# Altium PCB 2014 12 12 DRIVER.PcbDoc
Units mil, origin at the board's own origin, x right, y up, seen from the top; angles counter-clockwise.
Board outline 3000 x 2605 mil, 2 copper layers (Top Layer, Bottom Layer); 70 components, 51 nets, 223 pads, 48 vias.
Unrouted connection lines stored in the file: 1.
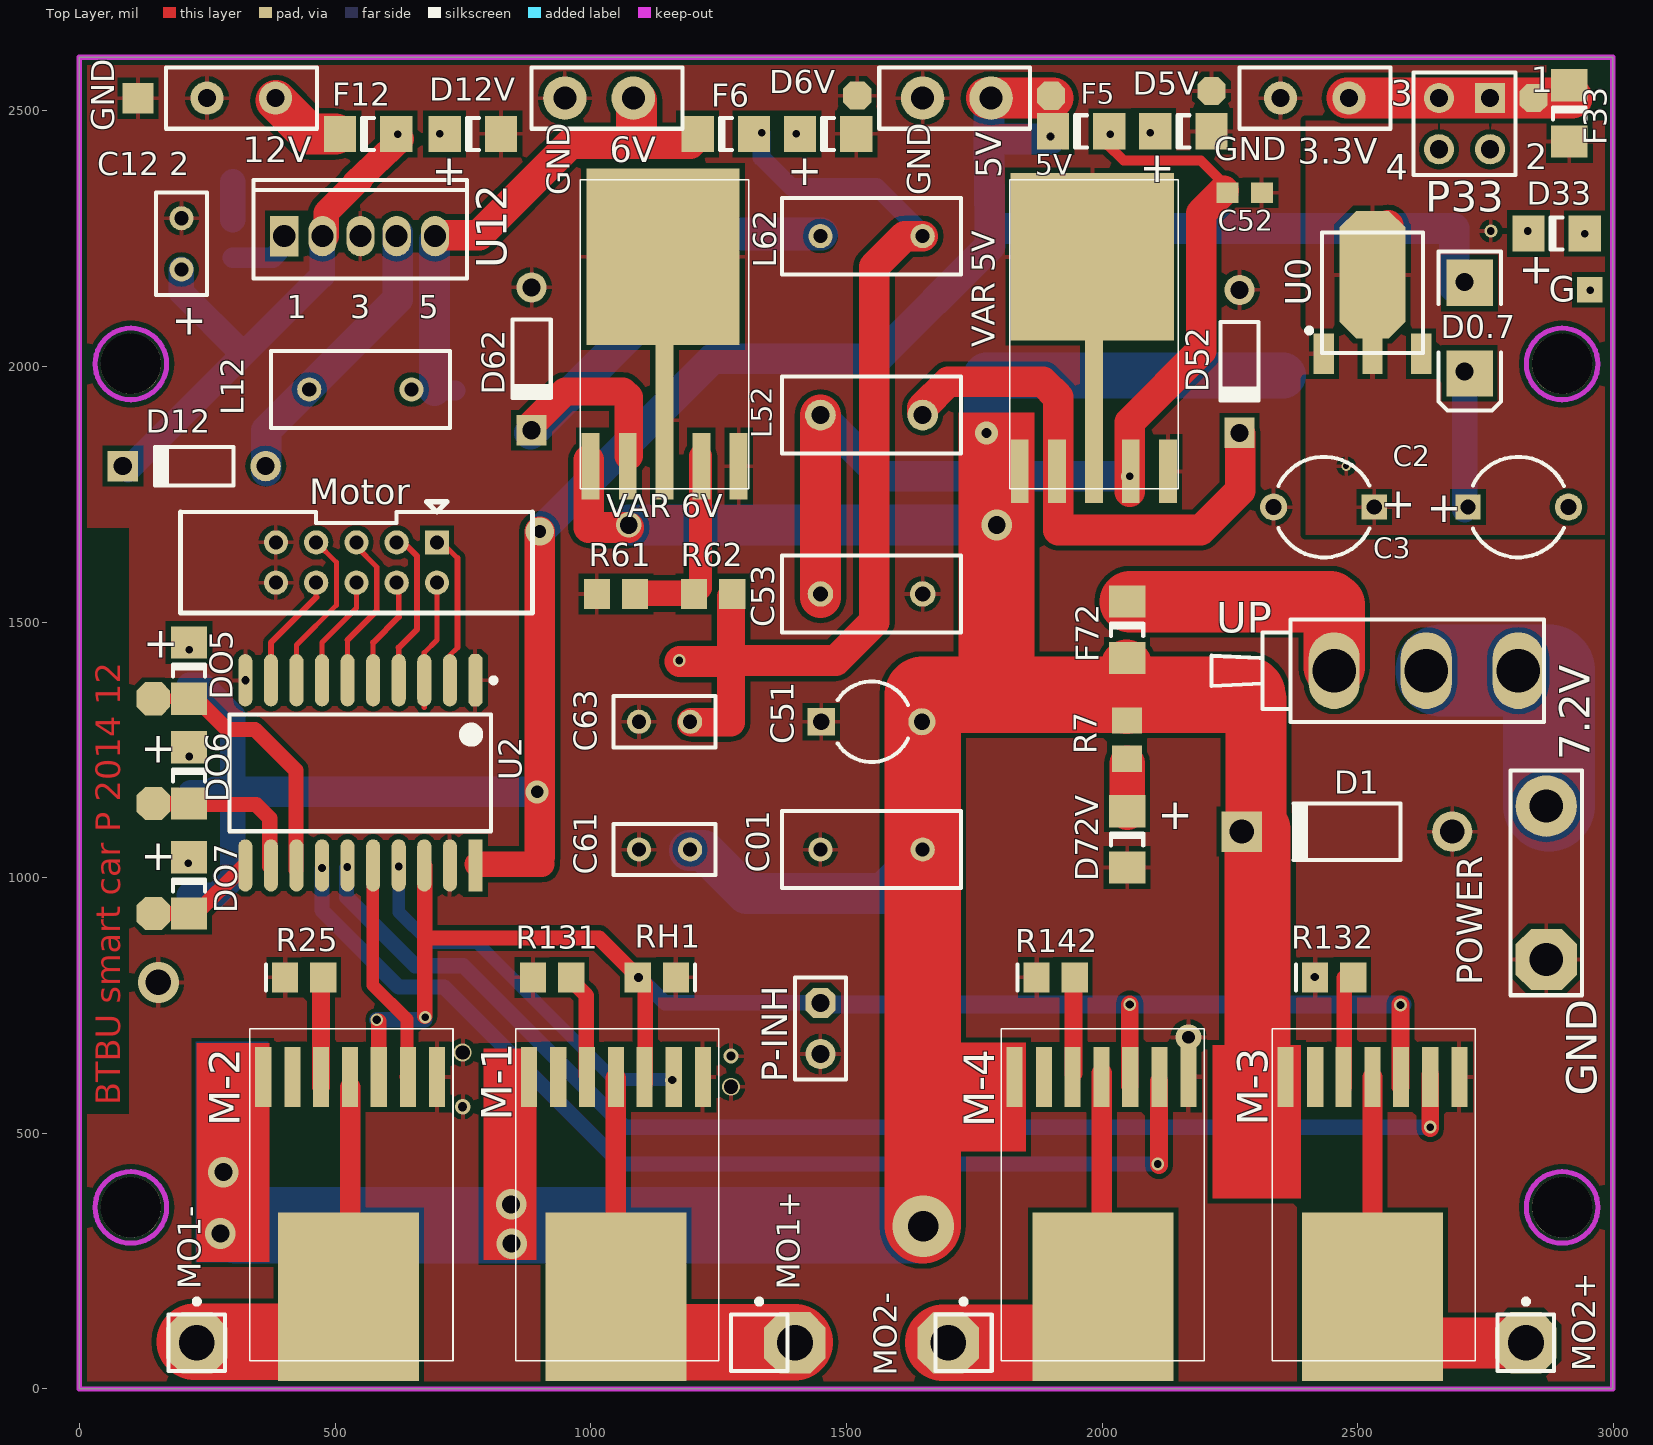
[diagram p0: Top Layer view]
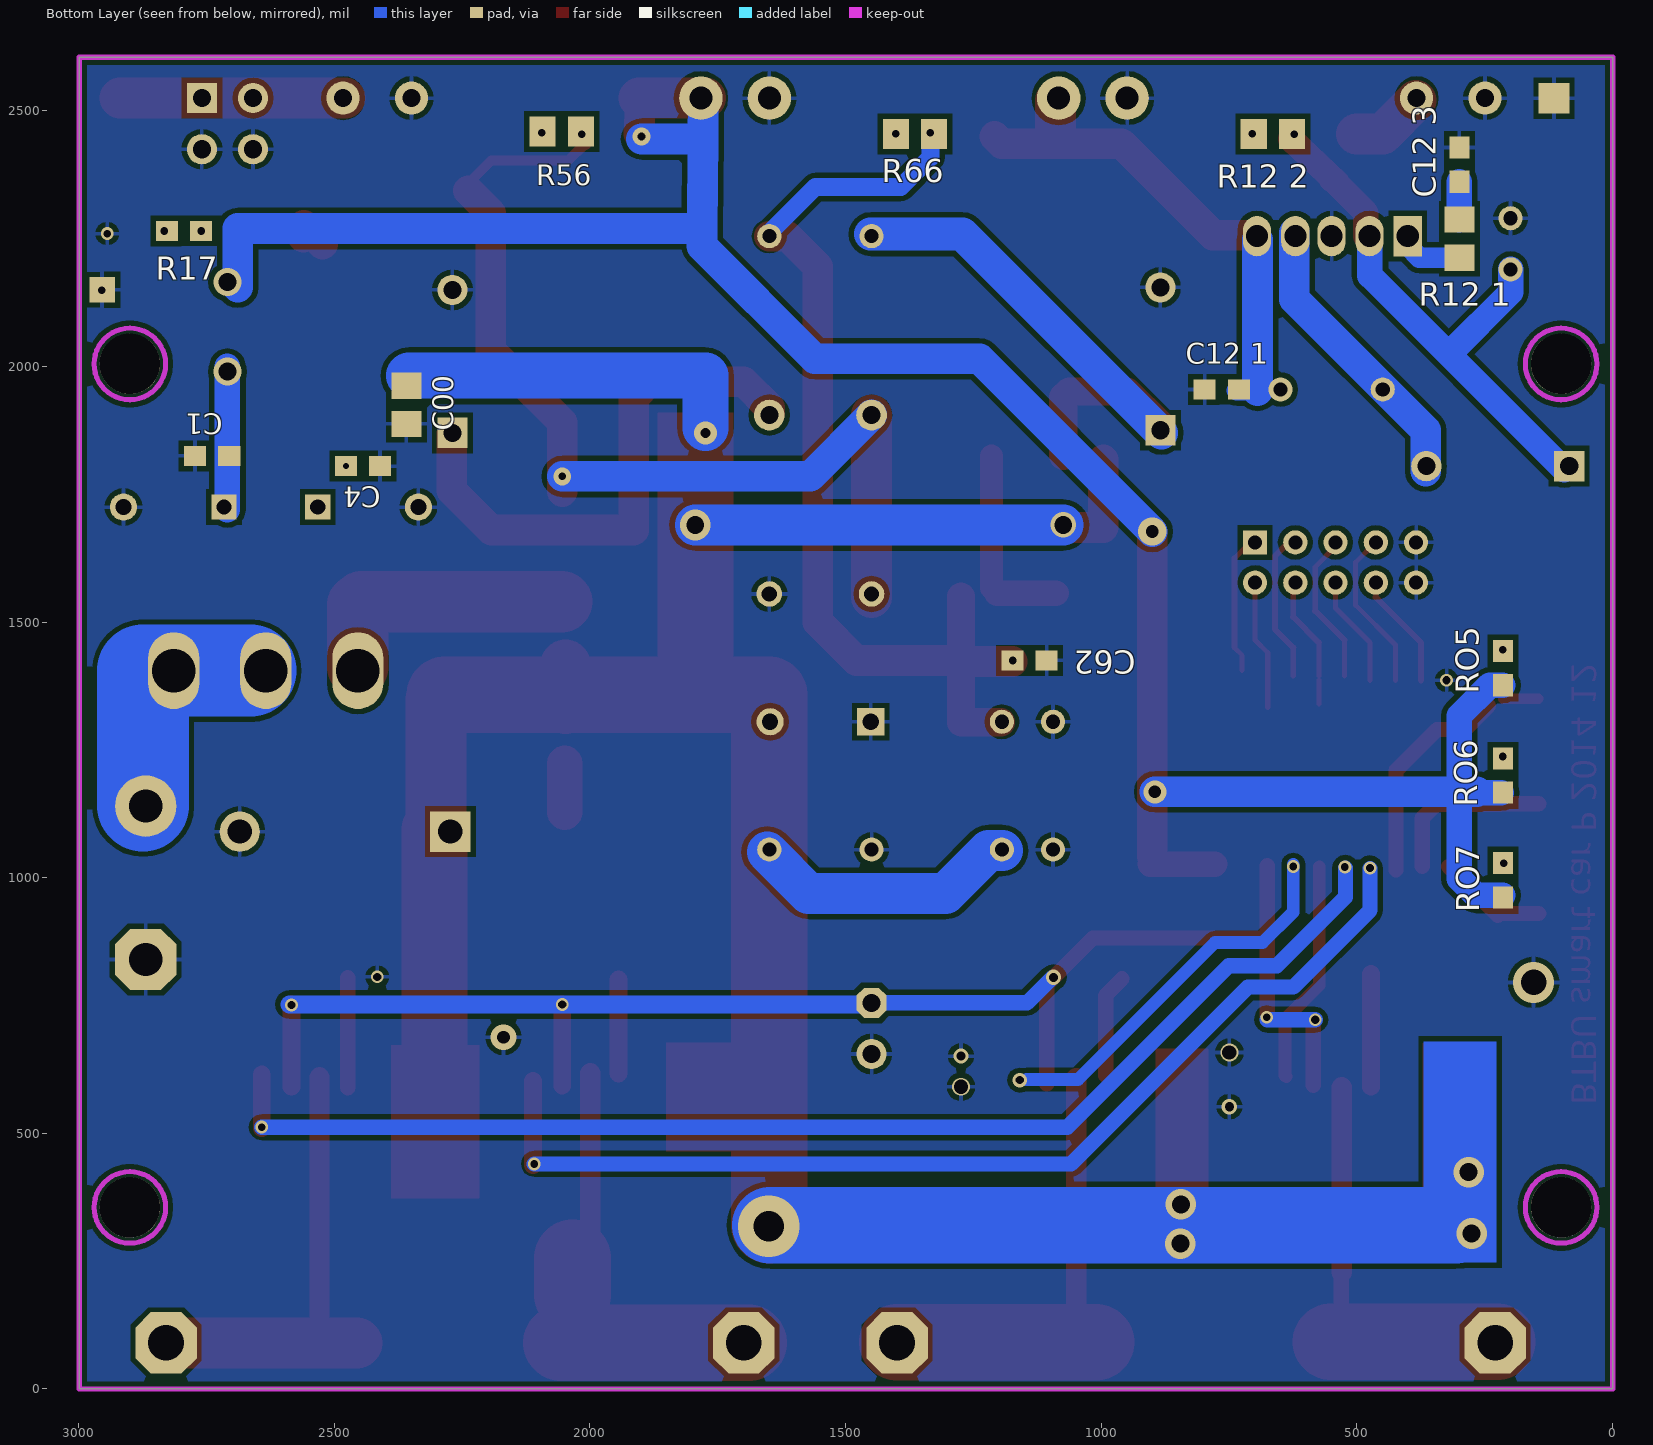
[diagram p1: Bottom Layer view, seen from below]

## Layer stack, top to bottom
Top Layer: signal copper 1.4
Dielectric: dielectric 12.6, FR-4, Dk 4.8
Bottom Layer: signal copper 1.4

## Board outline
-1,2605 2999,2605 2999,0 -1,0

## Design rules (kind name [scope] priority, off if disabled: settings)
Clearance [All] p1: gap=6
ComponentClearance [All] p1: gap=10 collisioncheckmode=3 verticalgap=10
DiffPairsRouting [All] p1: maxlimit=10 minlimit=8 mostfreqgap=10 maxuncoupledlength=500
PlaneClearance [All] p1: clearance=10
PolygonConnect [All] p1: connectstyle=Relief reliefconductorwidth=8 reliefentries=4 polygonreliefangle="90 Angle"
RoomDefinition "2013 11 11 DRIVER" [InComponentClass('2013 11 11 DRIVER')] p1: confinementstyle=ConfineIn formatcopy=TRUE lockcomponents=FALSE outline 3518.6,53.9 4321,53.9 4321,771.9 3518.6,771.9
RoutingVias [All] p1: holewidth=15 width=20 viastyle="Through Hole" minholewidth=12 minwidth=18 maxholewidth=80 maxwidth=120
SolderMaskExpansion [All] p1: expansion=6
TestPointUsage [All] p1: valid=0 allowmultiple=FALSE
Testpoint [All] p1: side=7 testpointundercomponent=TRUE minsize=40 maxsize=100 preferedsize=60 minholesize=0 maxholesize=40 preferedholesize=32 testpointgrid=1 style=1021 order=0-112345678
Width [All] p1: maxlimit=200 minlimit=10 preferedwidth=10 toplayer_prefwidth=12 bottomlayer_prefwidth=12 minimp=50.000000 maximp=50.000000 favimp=50.000000
16 further rules are at their usual default settings.

## Components (designator, comment, footprint, x,y, rotation, side; value= is the part's Value field where it differs from the comment)
C00 "104  16V" 2012[0805] 2359,1925 r90 bottom
C01 "Cap Pol3" RAD-0.2#1 1549,1055 r180 top
C1 "C1" 1608[0603] 2739,1825 r180 bottom
C2 "47uf" CAPPR5-5x5 2814,1725 r0 top
C3 "47uf" CAPPR5-5x5 2434,1725 r180 top
C4 "C1" 1608[0603] 2444,1805 r0 bottom
"C12 1" "104" 1608[0603] 764,1955 r180 bottom
"C12 2" "Cap Pol3" RAD-0.1 199,2240 r90 top
"C12 3" ".33" 1608[0603] 299,2395 r270 bottom
C51 "300uF" CAPR5-4X5 1549,1305 r0 top
C52 "104" 1608[0603] 2279,2340 r180 top
C53 "Cap Pol3" RAD-0.2#2 1549,1555 r0 top
C61 "100uF" RAD-0.1 1144,1055 r0 top
C62 "104" 1608[0603] 1140,1425 r0 bottom
C63 "Cap Pol3" RAD-0.1 1144,1305 r180 top
D0.7 "D Schottky" SMB 2719,2075 r270 top
D1 "1N4007" DO-41 2479,1090 r180 top
D5V "LED3" C1206 2159,2460 r0 top
D6V "LED3" C1206 1464,2455 r0 top
D12 "1N5822" DO-35 224,1805 r180 top
D12V "LED3" C1206 769,2455 r0 top
D33 "LED3" C1206 2889,2260 r0 top (schematic designator GREEN)
D52 "11DQ06" DO-35 2269,2010 r270 top (schematic designator D62)
D62 "1N5822" DO-35 884,2015 r270 top
D72V "LED3" C1206 2049,1075 r270 top
DO5 "LED3" C1206 214,1405 r270 top (schematic designator D12V)
DO6 "LED3" C1206 214,1200 r270 top (schematic designator D12V)
DO7 "LED3" C1206 214,985 r270 top (schematic designator D12V)
F5 "Fuse 1" C1206 1959,2460 r0 top
F6 "Fuse 1" C1206 1264,2455 r0 top
F12 "Fuse 1" C1206 564,2455 r0 top
F33 "Fuse 1" C1206 2914,2495 r270 top
F72 "Fuse 1" C1206 2049,1485 r270 top
L12 "Inductor Iron" RAD-0.2#1 549,1955 r180 top
L52 "Inductor Iron" RAD-0.2#3 1549,1905 r180 top
L62 "Inductor Iron" RAD-0.2#1 1549,2255 r0 top
M-1 "BTN7970B" TO263-7#1 1199,610 r180 top locked
M-2 "BTN7970B" TO263-7#2 679,610 r180 top locked
M-3 "BTN7970B" TO263-7#3 2679,610 r180 top locked
M-4 "BTN7970B" TO263-7#4 2149,610 r180 top locked
MO1+ "" PIN1#1 1329,90 r0 top
MO1- "" PIN1#2 229,90 r0 top
MO2+ "" PIN1#2 2829,90 r0 top
MO2- "" PIN1#3 1729,90 r0 top
Motor "MHDR2X5" IDC10S 699,1655 r0 top
P33 "S1" HDR2X2 2759,2525 r180 top
P-INH "Header 2" HDR1X2#1 1449,755 r270 top
POWER "Header 2" HDR1X2#2 2869,940 r90 top
R7 "Res Semi" 2012[0805] 2049,1270 r90 top
"R12 1" "Res Semi" 2012[0805] 299,2250 r270 bottom
"R12 2" "Res Semi" 2012[0805] 664,2455 r180 bottom
R17 "Res3" J1-0603 2794,2265 r180 bottom
R25 "Res Semi" 0805 439,805 r0 top (schematic designator R14)
R56 "Res Semi" 2012[0805] 2055,2460 r180 bottom
R61 "Res Semi" 2012[0805] 1049,1555 r0 top
R62 "Res Semi" 2012[0805] 1239,1555 r0 top
R66 "Res Semi" 2012[0805] 1364,2455 r180 bottom
R131 "Res Semi" 2012[0805] 924,805 r0 top
R132 "Res Semi" 0805 2454,805 r0 top
R142 "Res Semi" 0805 1909,805 r0 top
RH1 "Res Semi" 0805 1129,805 r180 top
RO5 "Res3" J1-0603 214,1410 r270 bottom
RO6 "Res3" J1-0603 214,1200 r270 bottom
RO7 "Res3" J1-0603 214,995 r270 bottom
U0 "LM1117 IMPX 3.3" SOT89 2529,2125 r0 top
U2 "M74HC541M1R" SO20_M 549,1205 r270 top
U12 "LM2577T-12" T05A 549,2255 r0 top locked
UP "DIP4_1" TL36WW15050 2614,1405 r180 top
"VAR 5V" "LM2576-5.0" TO263-5#1 2019,1805 r0 top
"VAR 6V" "LM2576-5.0" TO263-5#2 1179,1805 r0 top

## Footprints (in the part's own frame and the unit in brackets; to place one, negate y for a bottom-side part, rotate by r counter-clockwise, add the part's x,y. Pads: shape width x height; smd on the part's side, far side on the other; paste and mask are expansions set on the pad)
0805 [mm] "Chip Capacitor; Body 2.0 x 1.2 mm (LxW typ)"
  rect 1.3x1.5 smd: 1(-0.95,0) 2(0.95,0)
  silkscreen extent -1.9,-0.65 -1.9,0.65
1608[0603] [mm] "Chip Capacitor; Body 1.6 x 0.8 mm (LxW typ)"
  rect 1.1x1 smd: 1(-0.85,0) 2(0.85,0)
2012[0805] [mm] "Chip Resistor; Body 2.0 x 1.3 mm (LxW typ)"
  rect 1.3x1.5 smd: 1(-0.95,0) 2(0.95,0)
C1206 [mm] "Chip Capacitor; Body 3.2 x 1.6 mm (LxW typ)"
  rect 1.6x1.8 smd: 1(-1.4,0) 2(1.4,0)
  silkscreen extent -0.3,-0.8 0.3,0.8
CAPPR5-5x5 [mm] "Capacitor, Electrolytic, Radial; Body 5 x 5 mm (Dia.xH typ); Pin Spacing 5 mm (typ)"
  rect 1.25x1.25 hole 0.75: 1(-2.5,0)
  round 1.35 hole 0.8: 2(2.5,0)
  silkscreen extent -2.26,-2.5 2.27,2.5
CAPR5-4X5 [mm] "Capacitor; 2 Leads"
  rect 1.35x1.35 hole 0.8: 1(-2.5,0)
  round 1.35 hole 0.8: 2(2.5,0)
  silkscreen extent -1.69,-2 1.82,2
DO-35 [mm] "Diode, Axial; Body 3.8 x 1.9 mm (LxDia. max), Lead Dia. 0.53 mm (max)"
  round 1.5 hole 0.9: 1(-3.55,0)
  rect 1.5x1.5 hole 0.9: 2(3.55,0)
  silkscreen extent -1.95,-0.95 2.05,0.95
DO-41 [mm] "Diode, Axial; Body 5.2 x 2.7 mm (LxDia. max), Lead Dia. 0.86 mm (max)"
  round 2 hole 1.2: 1(-5.23,0)
  rect 2x2 hole 1.2: 2(5.23,0)
  silkscreen extent -2.65,-1.4 2.73,1.4
HDR1X2#1 [mm] "Connector; Header; 2 Position"
  oct 1.5x1.5 hole 0.9: 1(0,0)
  round 1.5 hole 0.9: 2(2.54,0)
  silkscreen extent -1.27,-1.27 3.81,1.27
HDR1X2#2 [mm] "Connector; Header; 2 Position"
  oct 3.048x3.048 hole 1.651: 1(-2.54,0)
  round 3.048 hole 1.651: 2(5.08,0)
  silkscreen extent -4.32,-1.78 6.86,1.78
HDR2X2 [mm] "Connector; Header; 2x2 Position"
  rect 1.5x1.5 hole 0.9: 1(0,0)
  round 1.5 hole 0.9: 2(0,2.54) 3(2.54,0) 4(2.54,2.54)
  silkscreen extent -1.27,-1.27 3.81,3.81
IDC10S [mm]
  rect 1.2x1.2 hole 0.7: 1(-0.006,0.022)
  round 1.2 hole 0.7: 2(-0.006,-1.978) 3(-2.006,0.022) 4(-2.006,-1.978) 5(-4.006,0.022) 6(-4.006,-1.978) 7(-6.006,0.022) 8(-6.006,-1.978) 9(-8.006,0.022) 10(-8.006,-1.978)
  silkscreen extent -12.76,-3.48 4.74,2.04
J1-0603 [mm] "Chip Resistor; Body 1.6 x 0.8 mm (LxW typ)"
  rect 1.1x1 smd: 1(-0.85,0) 2(0.85,0)
PIN1#1 [mil] "Generic Antenna; 1 Lead"
  oct 120x120 hole 70: 1(70,0)
  silkscreen extent -55,-55 55,86
PIN1#2 [mil] "Generic Antenna; 1 Lead"
  oct 120x120 hole 70: 1(0,0)
  silkscreen extent -55,-55 55,86
PIN1#3 [mil] "Generic Antenna; 1 Lead"
  oct 120x120 hole 70: 1(-30,0)
  silkscreen extent -55,-55 55,86
RAD-0.1 [mm] "Indicating Instrument; 2 Leads"
  round 1.2 hole 0.7: 1(-1.27,0) 2(1.27,0)
  silkscreen extent -2.54,-1.27 2.54,1.27
RAD-0.2#1 [mm] "Jumper Wire; 2 Leads"
  round 1.2 hole 0.7: 1(-2.54,0) 2(2.54,0)
  silkscreen extent -4.44,-1.91 4.44,1.91
RAD-0.2#2 [mm] "Jumper Wire; 2 Leads"
  round 1.27 hole 0.762: 1(-2.54,0) 2(2.54,0)
  silkscreen extent -4.44,-1.91 4.44,1.91
RAD-0.2#3 [mm] "Jumper Wire; 2 Leads"
  round 1.524 hole 0.889: 1(-2.54,0) 2(2.54,0)
  silkscreen extent -4.44,-1.91 4.44,1.91
SMB [mm] "DO-214-AA/SMB; 2 C-Bend Leads; Body 5.3 x 3.6 mm, inc. leads (LxW)"
  rect 2.3x2.3 smd: 1(-2.25,0) 2(2.25,0)
  silkscreen extent -3.8,-1.55 4.1,1.55
SO20_M [mm] "SOIC, 20-Leads, Body 12.8x7.5mm, Pitch 1.27mm, IPC Low Density"
  oct 2.6x0.7 smd: 1(-4.6,5.715)
  oval 2.6x0.7 smd: 2(-4.6,4.445) 3(-4.6,3.175) 4(-4.6,1.905) 5(-4.6,0.635) 6(-4.6,-0.635) 7(-4.6,-1.905) 8(-4.6,-3.175) 9(-4.6,-4.445) 10(-4.6,-5.715) 11(4.6,-5.715) 12(4.6,-4.445) 13(4.6,-3.175) 14(4.6,-1.905) 15(4.6,-0.635) 16(4.6,0.635) 17(4.6,1.905) 18(4.6,3.175) 19(4.6,4.445)
  rect 2.6x0.7 smd: 20(4.6,5.715)
  silkscreen extent -4.72,-6.5 2.9,6.74, body extent -3.75,-6.5 3.75,6.5, height 2.65
SOT89 [mil] "SOT-89; Body 4.6 x 4.25 mm, inc. leads (LxW max)"
  oct 129.92x250 smd: 0(0,54.65)
  rect 40x80 smd: 1(-95,-100) 3(95,-100)
  rect 40x140 smd: 2(0,-70)
  silkscreen extent -129,-99 98,137
T05A [mm] "TO, Thru-Hole, Vertical, Heatsink Mounted; 5 In-Line Leads; Pitch 1.70 mm"
  rect 1.4x2 hole 1.1: 1(-3.785,0)
  oval 1.4x2 hole 1.1: 2(-1.88,0) 3(0,0) 4(1.803,0) 5(3.708,0)
  silkscreen extent -5.3,-2.1 5.3,2.8
TL36WW15050 [mil] "SPDT Subminiature Toggle Switch, Right Angle Mounting, Vertical Actuation"
  oval 100x150 hole 85: 1(160,0) 2(-20,0) 3(-200,0)
  silkscreen extent -250,-100 400,100
TO263-5#1 [mil] "TO263 7"
  rect 35x125 smd: 1(-180,-10) 2(-107,-10) 4(37,-10) 5(110,-10)
  rect 35x320 smd: 3(-35,88)
  rect 320x328 smd: 6(-38,410)
  silkscreen extent -200,-44 130,560
TO263-5#2 [mil] "TO263 7"
  rect 35x130 smd: 1(-180,0) 2(-107,0) 4(37,0) 5(110,0)
  rect 35x310 smd: 3(-35,90)
  rect 300x345 smd: 6(-38,410)
  silkscreen extent -200,-44 130,560
TO263-7#1 [mm]
  rect 0.8x3 smd: 1(-0.508,0) 2(0.94,0) 3(2.388,0) 4(3.81,0) 5(5.258,0) 6(6.68,0) 7(8.128,0)
  rect 7x8.382 smd: 8(3.81,10.922)
  silkscreen extent -1.3,-2.4 8.8,14.1
TO263-7#2 [mm]
  rect 0.8x3 smd: 1(-0.508,0) 2(0.94,0) 3(2.388,0) 4(3.81,0) 5(5.258,0) 6(6.68,0) 7(8.128,0)
  rect 7x8.382 smd: 8(3.886,10.922)
  silkscreen extent -1.3,-2.4 8.8,14.1
TO263-7#3 [mm]
  rect 0.8x3 smd: 1(-0.508,0) 2(0.94,0) 3(2.388,0) 4(3.81,0) 5(5.258,0) 6(6.655,0) 7(8.128,0)
  rect 7x8.382 smd: 8(3.81,10.922)
  silkscreen extent -1.3,-2.4 8.8,14.1
TO263-7#4 [mm]
  rect 0.8x3 smd: 1(-0.508,0) 2(0.94,0) 3(2.388,0) 4(3.81,0) 5(5.258,0) 6(6.68,0) 7(8.128,0)
  rect 7x8.382 smd: 8(3.734,10.922)
  silkscreen extent -1.3,-2.4 8.8,14.1

## Part data
C00 C1 C4 "C12 1" "C12 3" C52 C62: library part "Cap Semi", "Capacitor (Semiconductor SIM Model)"
C01 "C12 2" C53 C63: "Polarized Capacitor (Surface Mount)"
C2: library part "Cap Pol3", "Polarized Capacitor (Surface Mount)"
C3: library part "Cap Pol1", "Polarized Capacitor (Radial)"
C51 C61: library part Cap2, "Capacitor"
D0.7: "Schottky Diode"
D1: library part LED3, "Typical BLUE SiC LED"
D5V D6V D12V D33 D72V DO5 DO6 DO7: "Typical BLUE SiC LED"
D12 D52 D62: library part "Diode 1N4007", "1 Amp General Purpose Rectifier"
F5 F6 F12 F33 F72: "Fuse"
L12 L52 L62: "Magnetic-Core Inductor"
M-1 M-2 M-3 M-4: library part Component_1
MO1+ MO1- MO2+ MO2-: library part Plug, "Plug"
Motor: "Header, 5-Pin, Dual row"
P-INH POWER: "Header, 2-Pin"
R7 "R12 1" "R12 2" R25 R56 R61 R62 R66 R131 R132 R142 RH1: "Semiconductor Resistor"
R17 RO5 RO6 RO7: "Resistor"
U0: library part "Volt Reg", "Voltage Regulator"
U2: "Octal Bus Buffer with 3 State Outputs (Non Inverted)"
U12: "Simple Switcher Step Up Voltage Regulator"
"VAR 6V": library part "Header 5", "Header, 5-Pin"

## Free pads (board coordinates)
  round 118.11 hole 118.11: 0(100,2005) 1(100,355) 2(2900,2005) 3(2900,355)
  round 65 hole 35: 0(249,2525) 0(382.86,2525) 0(2349,2525) 0(2482.86,2525)
  round 85 hole 45: 0(949,2525) 0(1082.86,2525) 0(1649,2525) 0(1782.86,2525)
  rect 50x50 all layers, no hole: 0(2954,2150)
  rect 60x60 all layers, no hole: 1(114,2525)
  oct 55x55 smd: 2(2844,2525) 3(1521,2530) 3(1900.32,2529.56) 3(2214,2539)
  oct 65x65 smd: 3(144,930) 3(144,1145) 3(144,1350)

## Via types
v1: diameter 25, hole 15, Top Layer to Bottom Layer, 19 vias
v2: diameter 60, hole 35, Top Layer to Bottom Layer, 5 vias
v3: diameter 25, hole 16, Top Layer to Bottom Layer, 5 vias
v4: diameter 30, hole 18, Top Layer to Bottom Layer, 3 vias
v5: diameter 35, hole 15, Top Layer to Bottom Layer, 2 vias
v6: diameter 35, hole 28, Top Layer to Bottom Layer, 2 vias
v7: diameter 55, hole 35, Top Layer to Bottom Layer, 2 vias
v8: diameter 120, hole 60, Top Layer to Bottom Layer, 1 vias
v9: diameter 45, hole 25, Top Layer to Bottom Layer, 1 vias
v10: diameter 45, hole 20, Top Layer to Bottom Layer, 1 vias
v11: diameter 28, hole 16, Top Layer to Bottom Layer, 1 vias
v12: diameter 50, hole 25, Top Layer to Bottom Layer, 1 vias
v13: diameter 80, hole 50, Top Layer to Bottom Layer, 1 vias
v14: diameter 30, hole 15, Top Layer to Bottom Layer, 1 vias
v15: diameter 55, hole 25, Top Layer to Bottom Layer, 1 vias
v16: diameter 50, hole 35, Top Layer to Bottom Layer, 1 vias
v17: diameter 18, hole 12, Top Layer to Bottom Layer, 1 vias

## Nets (pads, with @x,y where several pads share a name; then routed paths per layer and width w, separated by ;. In a path a pad name is that pad's centre, name@x,y a point inside that pad or via, vN(x,y) a via of type N, cw(c..) or ccw(c..) an arc to the next point about the centre after c; other vN are vias at no path point)
3.3V: F33.1 P33.1 P33.3 pad.0@2482.86,2525 pad.2@2844,2525 | length 440
  Top Layer w80: pad.0@2479,2525 F33.1@2919,2525
3V3: C3.1 C4.2 F33.2 R17.2 U0.0 U0.2 | length 75.3
  Top Layer w60: U0.0@2523,2239 2560,2276 U0.0@2561,2253
  other v1: 2760.54,2265
  other v17: 2477.46,1805
7.2V: "VAR 5V.1" "VAR 6V.1" C00.2 C01.1 C51.2 C61.2 D1.2 F72.2 M-1.7 M-2.7 M-3.7 M-4.7 R7.2 | length 6062.6
  Top Layer w60: 996,1817 996,1685 v16@1074,1685
  Top Layer w90: 2234,1365 2263.31,1358 2301,1349
  Top Layer w100: R7.2@2048,1331 F72.2@2048,1416
  Top Layer w120: 2230,1358 2243,1345 ; D1.2@2301,1098 2301,1349
  Top Layer w130: 2304,609 D1.2@2304,1094
  Top Layer w150: v8@1649,320 1649,1358 2284,1358
  Bottom Layer w80: v16(1074,1690) v2(1794,1690) ; C61.2@1193,1053 1220,1053 1304,969 1572,969 C01.1@1653,1050
  Bottom Layer w90: v10@1774,1880 1774,1982 C00.2@2354,1982
  Bottom Layer w150: 306,320 v8@1647,320
  other v2: 845,284 275,304 844,361 281,424
  other v8: 1650,318
  other v10: 1774,1870
12V: F12.1 pad.0@382.86,2525 | length 142.9
  Top Layer w80: pad.0@384,2520 449,2455 F12.1@500,2455
+5V: "VAR 5V.4" C52.2 C53.1 F5.2 L52.2 R56.2 | length 1966.7
  Top Layer w20: F5.2@2009,2436 2042,2403 2193,2403 C52.2@2244,2352
  Top Layer w25: F5.2@2009,2436 F5.2@2009,2456
  Top Layer w60: 2054,1755 2054,1891 2194,2031 2194,2300 C52.2@2238,2344
  Top Layer w80: C53.1@1449,1548 L52.2
  Bottom Layer w60: L52.2 1569,1785 v5(2054,1785)
  other v1: 2016,2454
+6V: C62.2 C63.1 F6.2 L62.2 R62.2 R66.2 | length 1978.1
  Top Layer w55: C63.1@1196,1304 1274,1304 R62.2@1274,1550
  Top Layer w60: v1@1174,1423 1266,1423 ; 1269,1425 1479,1425 1554,1500 1554,2195 1614,2255 L62.2
  Bottom Layer w25: L62.2@1651,2255 L62.2@1651,2259
  Bottom Layer w35: v14(1334,2457) 1334,2409 1392,2351 1559,2351 L62.2@1651,2259
  other v1: 1173,1425
ADJ: "VAR 6V.4" R61.2 R62.1 | length 389
  Top Layer w45: R62.1@1203.7,1556 1214,1566.3 1214,1825
  Top Layer w50: R61.2@1088,1556 R62.1@1203.7,1556
GND: "C12 1.1" "C12 2.2" "C12 3.1" "VAR 5V.3" "VAR 5V.5" "VAR 5V.6" "VAR 6V.3" "VAR 6V.5" "VAR 6V.6" C00.1 C1.1 C01.2 C2.2 C3.2 C4.1 C51.1 C52.1 C53.2 C61.1 C62.1 C63.2 D1.1 D5V.2 D6V.2 D12V.2 D33.2 D52.1 D62.1 D72V.2 M-1.1 M-2.1 M-3.1 M-4.1 Motor.9 Motor.10 P33.2 P33.4 P-INH.2 pad.0@249,2525 pad.0@949,2525 pad.0@1649,2525 pad.0@2349,2525 pad.0@2954,2150 pad.1@114,2525 pad.3@1521,2530 pad.3@2214,2539 POWER.1 R25.1 R61.1 R131.1 R132.1 R142.1 RH1.1 U0.1 U2.1 U2.10 U2.19 U12.3
  other v1: 2955,2149 2944.12,2260
  other v3: 2416,806 324,1386.1
  other v4: 749,552 1274,651
  other v6: 1274,591 749,658
  other v12: 2169,688
  other v13: 154,795
INH: M-1.3 M-2.3 M-3.3 M-4.3 P-INH.1 RH1.2 U2.18 | length 3006.4
  Top Layer w30: M-2.3@585,594 v3@585,719 ; v1@675,729 U2.18@675,1023 ; 677,882 1016,882 1106,792 M-1.3@1106,597
  Top Layer w35: M-4.3@2054,593 v3(2054,752) ; M-3.3@2584,591 v3@2584,752
  Bottom Layer w30: v3(581,722) v1@675,722 ; v4@1097,803 1145,755 1458,755 P-INH.1@1461,752
  Bottom Layer w35: P-INH.1@1461,752 v3@2588,752
  other v1: 676,727
  other v3: 2584,751
  other v4: 1093,805
MO1+: M-1.4 M-1.8 MO1+.1 | length 845
  Top Layer w40: M-1.8@1049,152 M-1.4@1049,608
  Top Layer w150: M-1.8@1010,91 MO1+.1@1399,91
MO1-: M-2.4 M-2.8 MO1-.1 | length 770.7
  Top Layer w8: M-2.8@529,228 M-2.8@530.88,229.88
  Top Layer w30: M-2.8@530,171 M-2.8@530,251
  Top Layer w40: M-2.8@529,228 M-2.4@529,590
  Top Layer w150: MO1-.1@225,92 M-2.8@551,92
MO2+: M-3.4 M-3.8 MO2+.1 | length 844
  Top Layer w40: M-3.8@2529,139 M-3.4
  Top Layer w100: M-3.8@2456,90 MO2+.1
MO2-: M-4.4 M-4.8 MO2-.1 | length 853
  Top Layer w40: M-4.8@1999,203 M-4.4@1999,617
  Top Layer w150: MO2-.1@1689,90 M-4.8@2056,90 ; M-4.8@2034,184 M-4.8@2034,256
NetC1_2: C1.2 C2.1 D0.7.2 U0.3 | length 280
  Bottom Layer w50: C2.1@2709,1720 v7@2709,2000
  other v7: 2709,1990
"NetC12 2_1": "C12 2.1" "R12 2.2" D12.2 F12.2 U12.2 | length 1096.7
  Top Layer w50: U12.2@482.07,2255 482.07,2301.07 546,2365 549,2365 ; 539,2360 F12.2@629,2445
  Bottom Layer w40: U12.2@474,2249 U12.2@481,2256
  Bottom Layer w50: D12.2@93.7,1797.7 474,2178 U12.2@474,2249 ; 199,2190 199,2145 319,2025
  other v1: 622,2454
"NetC12 3_2": "C12 3.2" "R12 1.1" | length 74.5
  Bottom Layer w50: 299,2287 299,2361.54
NetD5V_1: D5V.1 R56.1
  other v1: 2094,2457
NetD6V_1: D6V.1 R66.1
  other v1: 1401.4,2455
NetD12_1: D12.1 L12.2 U12.4 | length 572.3
  Bottom Layer w60: D12.1@364.94,1795.16 364.94,1874.94 622,2132 U12.4@622,2261
NetD12V_1: "R12 2.1" D12V.1
  other v1: 704,2455
NetD33V_1: D33.1 R17.1
  other v1: 2832.46,2265
NetD52_2: "VAR 5V.2" D52.2 L52.1 | length 1056.4
  Top Layer w60: L52.1@1648,1910 1648,1919 1699,1970 1884,1970 1914,1940 1914,1841 ; 1914,1830 1914,1680 2193,1680 2270,1757 D52.2@2270,1868
NetD62_2: "VAR 6V.2" D62.2 L62.1 | length 1063.8
  Top Layer w55: D62.2@886,1888 949,1951 1063,1951 1074,1940 1074,1825
  Bottom Layer w65: D62.2@882,1870 1271,2259 L62.1@1451,2259
NetD72V_1: D72V.1 R7.1 | length 96
  Top Layer w70: D72V.1@2049,1128 R7.1@2049,1224
NetDO5_1: DO5.1 RO5.1
  other v1: 214,1446
NetDO6_1: DO6.1 RO6.1
  other v1: 214,1237
NetDO7_1: DO7.1 RO7.1
  other v1: 212,1028
NetF72_1: F72.1 UP.1 | length 527
  Top Layer w50: 2446,1548 2447,1534
  Top Layer w120: F72.1@2055,1540 2446,1540 ; UP.1@2454,1412 2454,1534
NetM-1_5: M-1.5 R131.2 | length 202.1
  Top Layer w30: R131.2@959,802 991,769.63 M-1.5@991,613
NetM-2_5: M-2.5 R25.2 | length 221
  Top Layer w35: M-2.5@472,591 R25.2@472,812
NetM-3_5: M-3.5 R132.2 | length 215
  Top Layer w30: M-3.5@2474,589 R132.2@2474,804
NetM-4_5: M-4.5 R142.2 | length 184
  Top Layer w35: M-4.5@1944,617 R142.2@1944,801
NetPOWER_2: POWER.2 UP.2 UP.3 | length 474
  Bottom Layer w180: UP.2@2664,1405 2874,1405 POWER.2@2874,1141
"NetR12 1_2": "R12 1.2" U12.1 | length 131.7
  Bottom Layer w40: 299,2212.6 377.6,2212.6 ; 377,2213 399,2235 U12.1@399,2257
OUT1: M-1.2 U2.17 | length 750.9
  Bottom Layer w25: v1@624,1026 624,933 684,873 777,873 1045,605 v11@1146,605
  other v1: 624,1022
  other v11: 1159,604
OUT2: M-2.2 U2.16 | length 439.1
  Top Layer w25: U2.16@573,1021 573,790 640,723 640,613 M-2.2@637.6,610.6
OUT3: M-3.2 U2.15 | length 2468.4
  Top Layer w35: v1@2642,510 M-3.2@2642,615
  Bottom Layer w30: v1@522,1019 522,962 656,828 750,828 1066,512 v1(2642,512)
  other v1: 523,1021
OUT4: M-4.2 U2.14 | length 2086.4
  Top Layer w35: v1@2111,438 M-4.2@2111,602
  Bottom Layer w30: v1@474,1018 474,936 624,786 713,786 1059,440 v1(2109,440)
  other v1: 474,1019
OUT5: DO5.2 pad.3@144,1350 U2.13 | length 498.1
  Top Layer w20: pad.3@144.12,1349.88 DO5.2
  Top Layer w30: DO5.2@242,1336 288,1290 343,1290 423,1210 U2.13@423,1015
OUT6: DO6.2 pad.3@144,1145 U2.12 | length 329.1
  Top Layer w30: pad.3@144.12,1144.88 DO6.2 ; DO6.2@218,1143 345,1143 372,1116 U2.12@372,1022
OUT7: DO7.2 pad.3@144,930 U2.11 | length 206.6
  Top Layer w20: U2.11@320,1021 U2.11@320,1022
  Top Layer w30: pad.3@144.12,929.88 DO7.2 ; DO7.2@224,926 U2.11@320,1022
PTC0: Motor.1 U2.2 | length 279.2
  Top Layer w10: Motor.1 708.14,1655.86 739,1625 ; U2.2@724,1405 724,1435 739,1450
  Top Layer w12: 739,1450 739,1625
PTC1/CH0: Motor.2 U2.3 | length 254.4
  Top Layer w10: 674,1333 674,1440 698.78,1464.78 Motor.2
PTC2/CH1: Motor.3 U2.4 | length 302.8
  Top Layer w10: Motor.3@619,1660 Motor.3@629,1660 ; U2.4@624,1395 624,1450
  Top Layer w12: 624,1450 660,1486 660,1629 Motor.3@629,1660
PTC3/CH2: Motor.4 U2.5 | length 246.8
  Top Layer w10: U2.5@574,1340 U2.5 ; U2.5@574,1395 574,1460 ; 624,1510 Motor.4@624,1575
  Top Layer w12: 574,1460 624,1510
PTC4/CH3: Motor.5 U2.6 | length 300.9
  Top Layer w10: U2.6@524,1395 524,1465 ; Motor.5 541.3,1647.7 581,1608 581,1522
  Top Layer w12: 524,1465 581,1522
PTD4/CH4: Motor.6 U2.7 | length 218.9
  Top Layer w10: U2.7 474,1460 541.3,1527.3 Motor.6
PTD5/CH5: Motor.7 U2.8 | length 318.7
  Top Layer w10: U2.8 424,1455 502,1533 502,1617 463.14,1655.86 Motor.7
PTD6/CH6: Motor.8 U2.9 | length 227.7
  Top Layer w10: 462.56,1548.56 Motor.8
  Top Layer w12: U2.9 374,1460 462.56,1548.56
VCC: D0.7.1 F5.1 pad.0@1782.86,2525 pad.3@1900.32,2529.56 RO5.2 RO6.2 RO7.2 U2.20 | length 4714.6
  Top Layer w50: U2.20@778,1026 904,1026
  Top Layer w60: 900,1041 v15(900,1677) ; pad.3@1900.32,2529.56 F5.1@1904,2455.12
  Top Layer w80: pad.0@1774,2525 pad.3@1904,2525
  Bottom Layer w50: RO7.2@214,966 267,966 299,998 299,1317 239.46,1376.54 RO5.2 ; RO6.2@217,1166 263,1166
  Bottom Layer w60: 265,1168 v9(895,1168) ; v15(900,1677) 1238,2015 1560,2015 1780.65,2235.65 1780.34,2270 ; pad.0@1778.06,2525.04 1778.06,2524.96 1778.78,2445 1780.34,2270 ; 1779,2445 v5@1899,2445 ; v7@2689,2155 2689,2270 1780.34,2270
  other v5: 1899,2450
  other v7: 2709,2165
VCC2: "C12 1.2" F6.1 L12.1 pad.0@1082.86,2525 U12.5 | length 990.9
  Top Layer w60: U12.5@698,2257 781,2257 960,2436 1194,2436 F6.1@1208,2450
  Top Layer w80: 1089,2455 pad.0@1089,2520
  Bottom Layer w40: 694,1953 735,1953
  Bottom Layer w60: 694,1953 U12.5@694,2248
pads on no net: M-1.6 M-2.6 M-3.6 M-4.6
copper on no net: | length 1638
  Bottom Layer w8: -2577.4,78599.9 -2577.4,78668.9 -2577.4,80237.9

## Polygon pours and split planes (outlines as drawn)
3V3 on Top Layer "Top Layer-3V3" (solid, remove dead copper, pour order 1000): 2372,2481 2998,2481 2998,1671 2398,1671 2398,2481
GND on Top Layer "Top Layer-GND" (solid, remove dead copper, pour order 1001): -1,2605 2994,2605 2994,3 1,3 1,2605
GND on Bottom Layer "Bottom Layer-GND" (solid, remove dead copper, pour order 1002): 1,2605 2999,2605 2999,3 -1,3 -1,2603

## Keep-outs
Keep-Out Layer:
  circle w10: c100,355 r70
  circle w10: c100,2005 r70
  circle w10: c2900,2005 r70
  circle w10: c2900,355 r70
  lines w10: -1,0 2999,0 2999,2605 -1,2605 -1,0

## Other copper
Top Layer:
  rectangle net 7.2V: 228,248 371,677
  rectangle net 7.2V: 2216,372 2389,673
  rectangle net 7.2V: 790,252 894,666
  rectangle net 7.2V: 1686,464 1851,678
  rectangle net 7.2V: 1719,1392 1868,1910
  text "BTBU smart car P 2014 12" at 79,555 h48 r90
Bottom Layer:
  rectangle net 7.2V: 226,247 369,680

## Silkscreen, mask and mechanical layers (free items; w line width, h text height)
Top Overlay:
  lines w8: 169,2465 464,2465 464,2585 169,2585 169,2465 ; 884,2465 884,2585 1179,2585 1179,2465 884,2465 ; 1564,2465 1564,2585 1859,2585 1859,2465 1564,2465 ; 2269,2465 2269,2585 2564,2585 2564,2465 2269,2465
  text "GND" at 68,2460 h45 r90
  text "GND" at 2219,2403 h45
  text "12V" at 319,2400 h50
  text "6V" at 1037,2400 h50
  text "3.3V" at 2383,2397 h50
  text "5V" at 1869,2375 h40
  text "5V" at 1803,2368 h50 r90
  text "+" at 2074,2360 h60
  text "+" at 689,2355 h60
  text "+" at 1384,2355 h60
  text "GND" at 959,2335 h45 r90
  text "GND" at 1664,2335 h45 r90
  text "+" at 2815,2162 h60
  text "G" at 2874,2127 h50
  text "+" at 179.91,2061.89 h60
  text "+" at 124,1430 h60
  text "7.2V" at 2954,1230 h60 r90
  text "+" at 119,1225 h60
  text "+" at 2109,1095 h60
  text "+" at 119,1015 h60
  text "GND" at 2968,573 h60 r90

## Text inside footprints (layer, text, board x,y; h text height)
C2: Top Overlay "+" at 2634.87,1695.47 h59.06
C3: Top Overlay "+" at 2613.13,1754.53 h59.06 r180
P33: Top Overlay "1" at 2839,2536 h50; Top Overlay "2" at 2828,2386 h50; Top Overlay "4" at 2555,2365 h50; Top Overlay "3" at 2565,2510 h50
U12: Top Overlay "5" at 663.17,2094.57 h45; Top Overlay "3" at 529.32,2094.57 h45; Top Overlay "1" at 405.3,2094.57 h45